# Altium PCB Copy of KNX_Relay_16CH_V1.2.PcbDoc (part 1 of 2)
Units mm, origin at the board's own origin, x right, y up, seen from the top; angles counter-clockwise.
Board outline 84.5 x 146.28 mm, 2 copper layers (F.Cu, B.Cu); 185 components, 162 nets, 571 pads, 629 vias.
Unrouted connection lines stored in the file: 248.
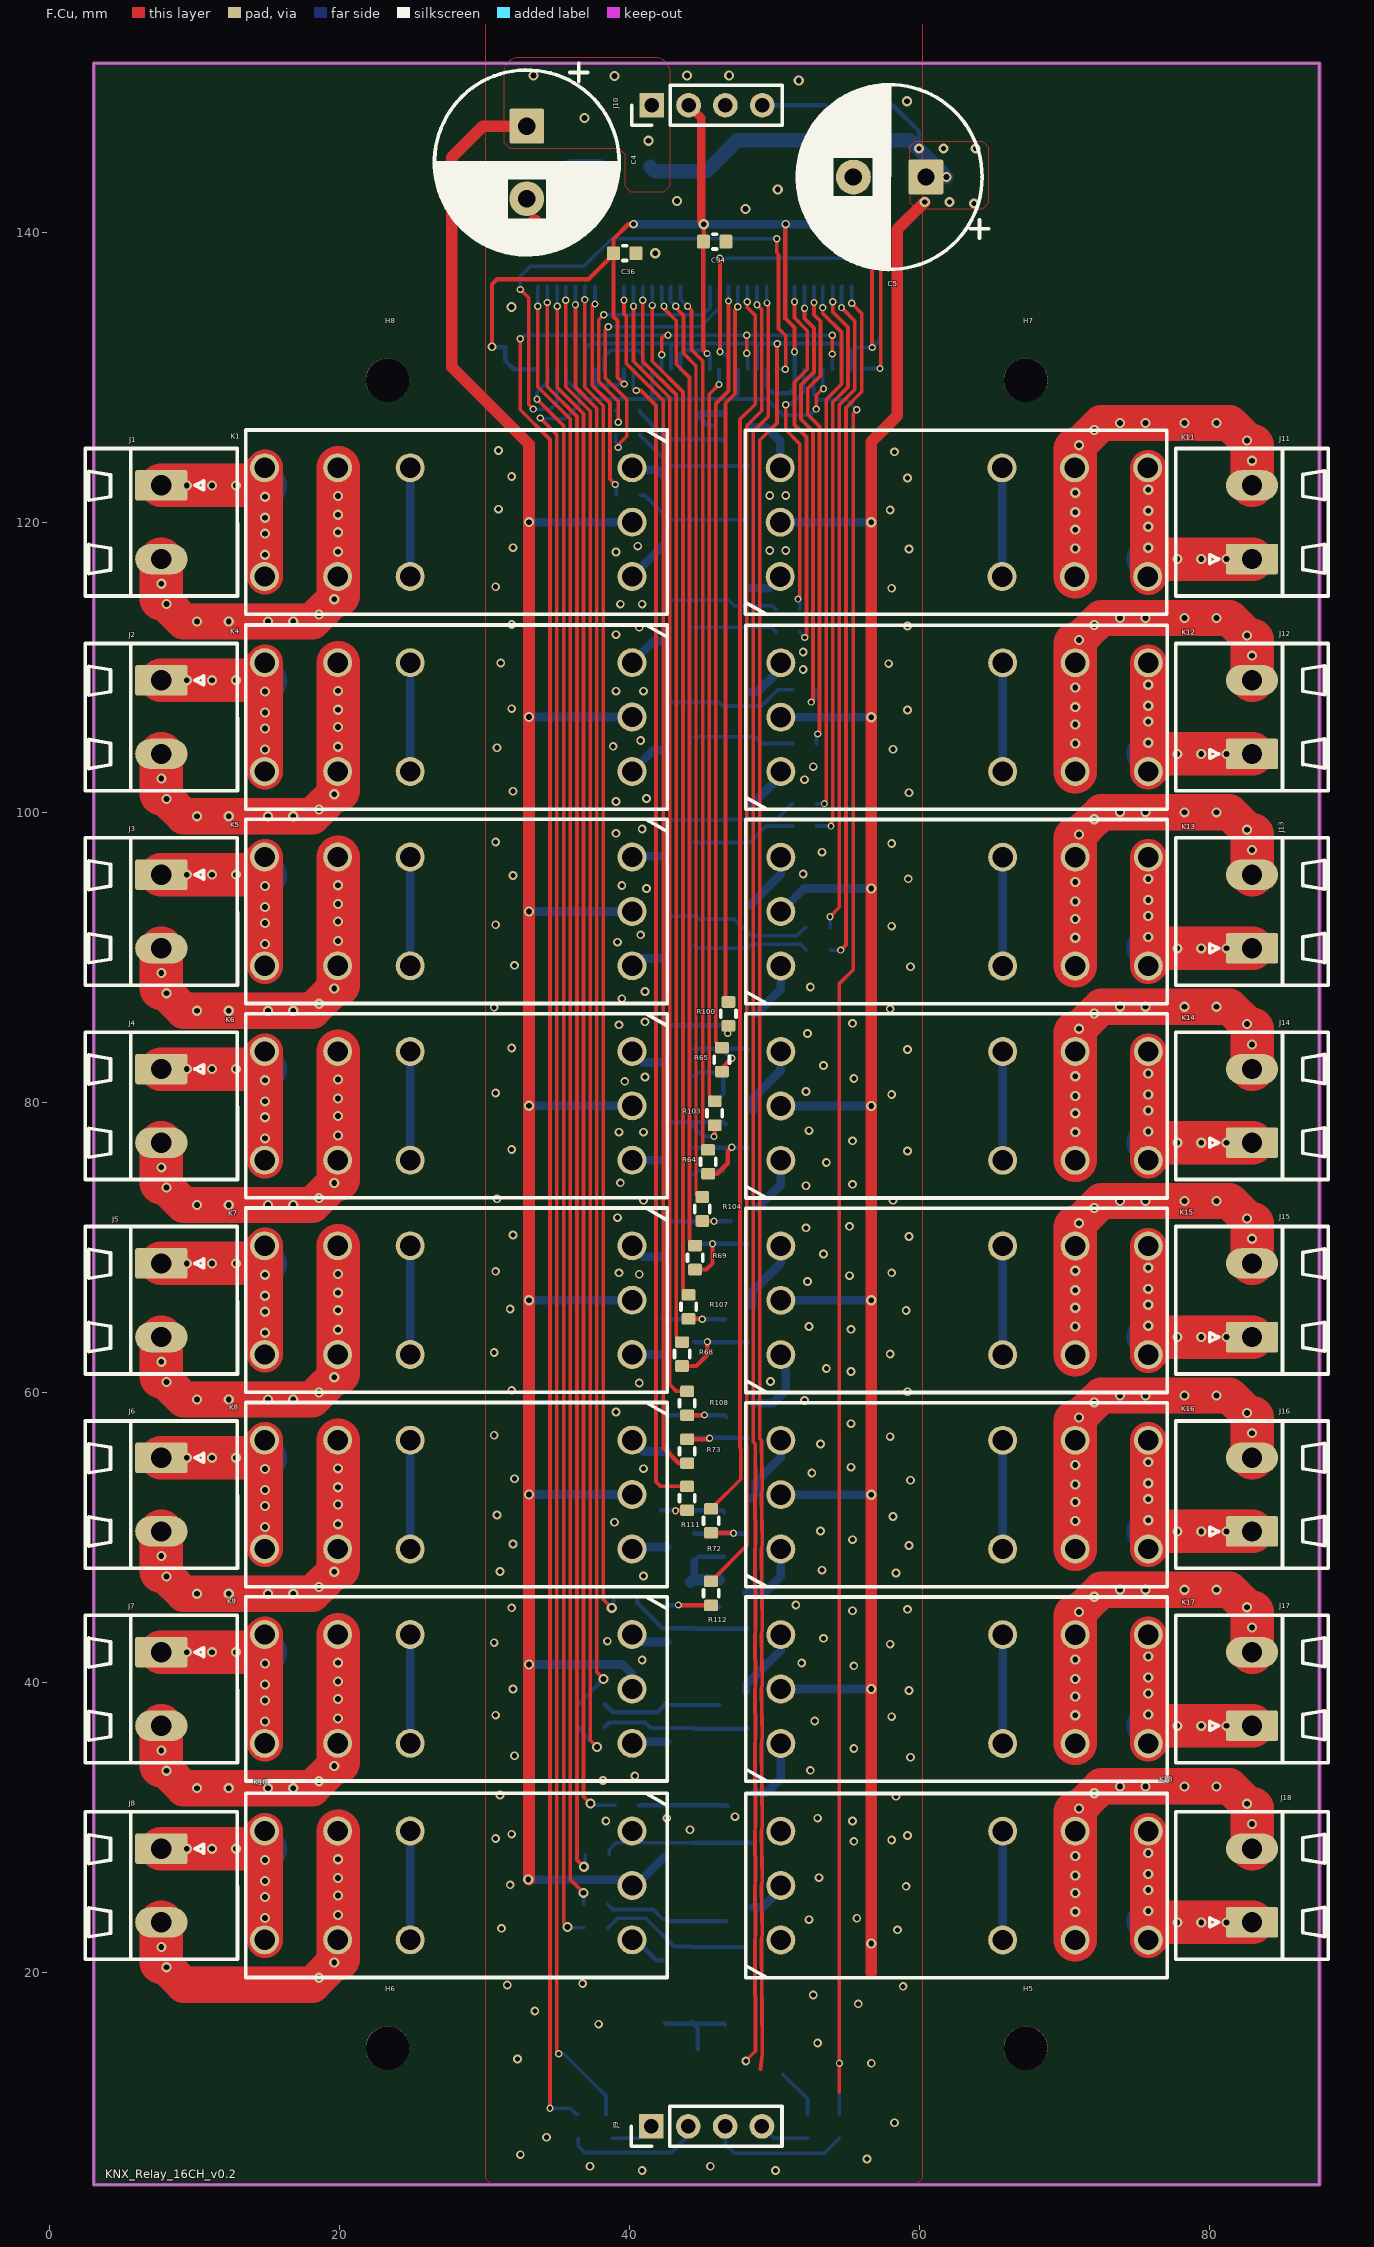
[diagram p0: F.Cu view]
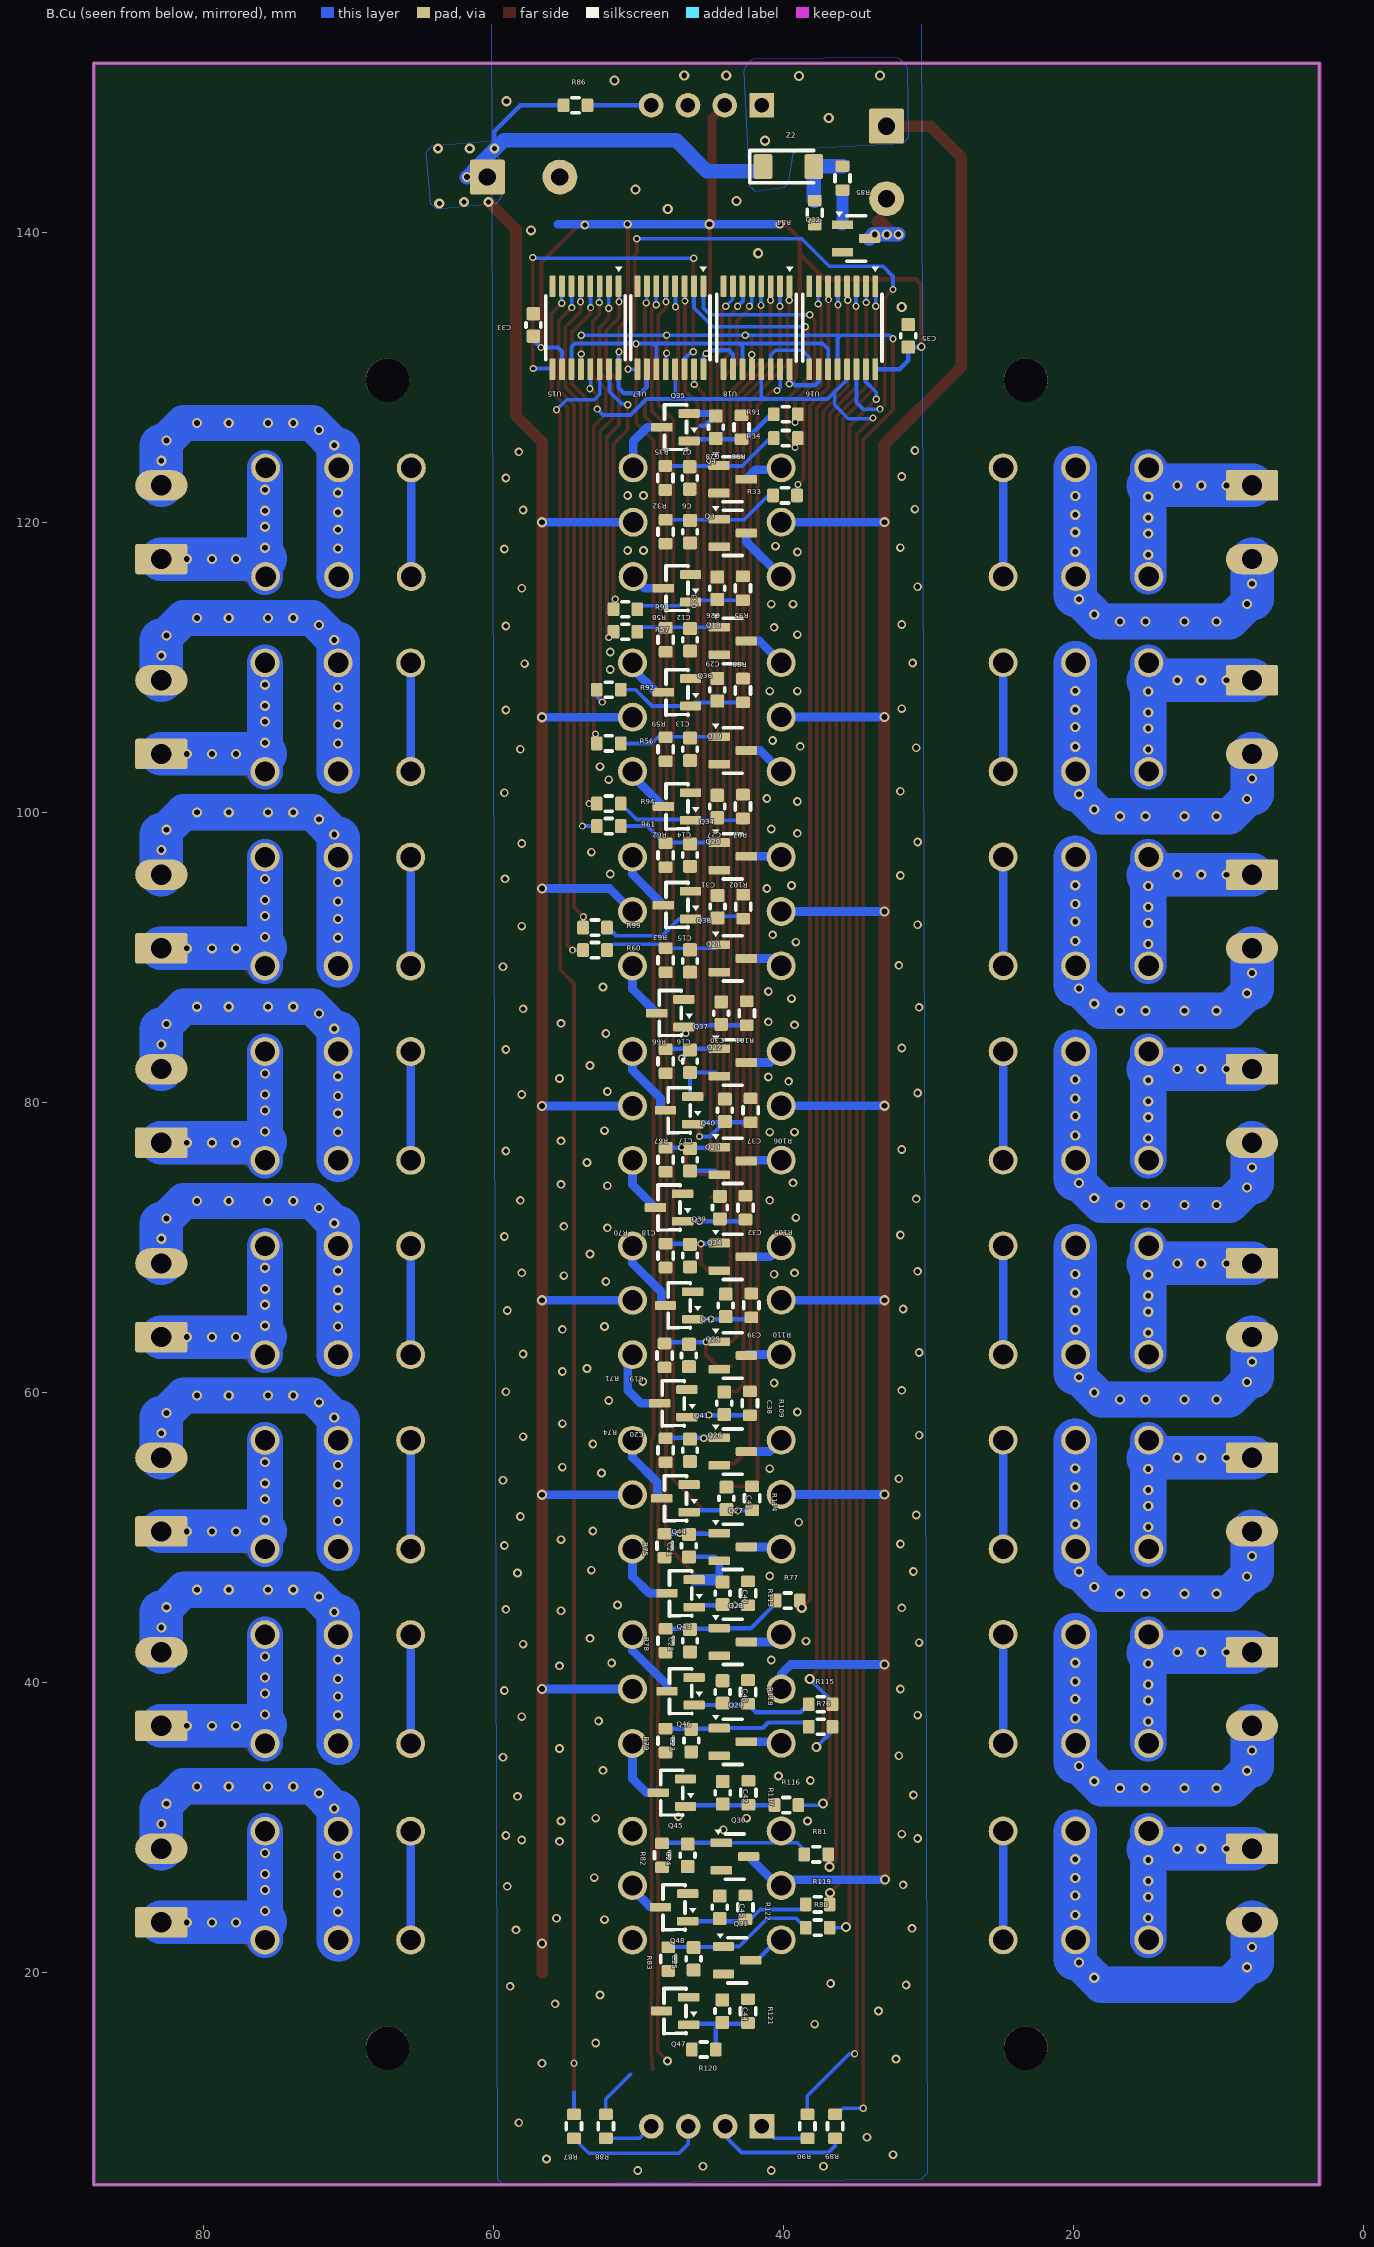
[diagram p1: B.Cu view, seen from below]

## Layer stack, top to bottom
F.Mask: solder mask 0.0102, Solder Resist, Dk 3.5
F.Cu: signal copper 0.0356
Dielectric 1: dielectric 0.32, FR-4, Dk 4.8
B.Cu: signal copper 0.0356
B.Mask: solder mask 0.0102, Solder Resist, Dk 3.5

## Board outline
3.05,5.36 3.05,151.64 87.55,151.64 87.55,5.36

## Design rules (kind name [scope] priority, off if disabled: settings)
Clearance [All] p1: gap=0.2 ignorepadtopadclearanceinfootprint=TRUE
Clearance "Clearence 0,5_Polygon" [InNamedPolygon('F.Cu-') OR InNamedPolygon('B.Cu-') OR InNamedPolygon('F.Cu--1') OR InNamedPolygon('B.Cu--1')] p2: gap=0.5 ignorepadtopadclearanceinfootprint=FALSE
Clearance "Clearence 0,35_Polygon" [InNamedPolygon('F.Cu--2') OR InNamedPolygon('B.Cu--2')] p3: gap=0.35 ignorepadtopadclearanceinfootprint=FALSE
Clearance "Clearence 0,2_NetClass" [InNetClass('Default')] p4: gap=0.2 ignorepadtopadclearanceinfootprint=FALSE
ComponentClearance [All] p1: gap=0 collisioncheckmode=3 verticalgap=0 showdistances=FALSE
MinimumSolderMaskSliver [All] p1: minsoldermaskwidth=0
PolygonConnect Polygon_B.Cu--2_ConnectDirect [IsNamedPolygon('B.Cu--2') vs IsVia] p1: connectstyle=Direct reliefconductorwidth=0.254 reliefentries=4 polygonreliefangle="90 Angle" airgapwidth=0.254
PolygonConnect Polygon_B.Cu--2_ConnectRelief45 [IsNamedPolygon('B.Cu--2') vs (IsThruPin or IsSMTPin) and (PadShape_AllLayers = 'Round')] p2: connectstyle=Relief reliefconductorwidth=0.35 reliefentries=4 polygonreliefangle="45 Angle" airgapwidth=0.35
PolygonConnect Polygon_B.Cu--2_ConnectRelief90 [IsNamedPolygon('B.Cu--2') vs (IsThruPin or IsSMTPin) and (PadShape_AllLayers <> 'Round')] p3: connectstyle=Relief reliefconductorwidth=0.35 reliefentries=4 polygonreliefangle="90 Angle" airgapwidth=0.35
PolygonConnect Polygon_F.Cu--2_ConnectDirect [IsNamedPolygon('F.Cu--2') vs IsVia] p4: connectstyle=Direct reliefconductorwidth=0.254 reliefentries=4 polygonreliefangle="90 Angle" airgapwidth=0.254
PolygonConnect Polygon_F.Cu--2_ConnectRelief45 [IsNamedPolygon('F.Cu--2') vs (IsThruPin or IsSMTPin) and (PadShape_AllLayers = 'Round')] p5: connectstyle=Relief reliefconductorwidth=0.35 reliefentries=4 polygonreliefangle="45 Angle" airgapwidth=0.35
PolygonConnect Polygon_F.Cu--2_ConnectRelief90 [IsNamedPolygon('F.Cu--2') vs (IsThruPin or IsSMTPin) and (PadShape_AllLayers <> 'Round')] p6: connectstyle=Relief reliefconductorwidth=0.35 reliefentries=4 polygonreliefangle="90 Angle" airgapwidth=0.35
PolygonConnect Polygon_B.Cu--1_ConnectDirect [IsNamedPolygon('B.Cu--1') vs IsVia] p7: connectstyle=Direct reliefconductorwidth=0.254 reliefentries=4 polygonreliefangle="90 Angle" airgapwidth=0.254
PolygonConnect Polygon_B.Cu--1_ConnectRelief45 [IsNamedPolygon('B.Cu--1') vs (IsThruPin or IsSMTPin) and (PadShape_AllLayers = 'Round')] p8: connectstyle=Relief reliefconductorwidth=0.5 reliefentries=4 polygonreliefangle="45 Angle" airgapwidth=0.5
PolygonConnect Polygon_B.Cu--1_ConnectRelief90 [IsNamedPolygon('B.Cu--1') vs (IsThruPin or IsSMTPin) and (PadShape_AllLayers <> 'Round')] p9: connectstyle=Relief reliefconductorwidth=0.5 reliefentries=4 polygonreliefangle="90 Angle" airgapwidth=0.5
PolygonConnect Polygon_F.Cu--1_ConnectDirect [IsNamedPolygon('F.Cu--1') vs IsVia] p10: connectstyle=Direct reliefconductorwidth=0.254 reliefentries=4 polygonreliefangle="90 Angle" airgapwidth=0.254
PolygonConnect Polygon_F.Cu--1_ConnectRelief45 [IsNamedPolygon('F.Cu--1') vs (IsThruPin or IsSMTPin) and (PadShape_AllLayers = 'Round')] p11: connectstyle=Relief reliefconductorwidth=0.5 reliefentries=4 polygonreliefangle="45 Angle" airgapwidth=0.5
PolygonConnect Polygon_F.Cu--1_ConnectRelief90 [IsNamedPolygon('F.Cu--1') vs (IsThruPin or IsSMTPin) and (PadShape_AllLayers <> 'Round')] p12: connectstyle=Relief reliefconductorwidth=0.5 reliefentries=4 polygonreliefangle="90 Angle" airgapwidth=0.5
PolygonConnect Polygon_B.Cu-_ConnectDirect [IsNamedPolygon('B.Cu-') vs IsVia] p13: connectstyle=Direct reliefconductorwidth=0.254 reliefentries=4 polygonreliefangle="90 Angle" airgapwidth=0.254
PolygonConnect Polygon_B.Cu-_ConnectRelief45 [IsNamedPolygon('B.Cu-') vs (IsThruPin or IsSMTPin) and (PadShape_AllLayers = 'Round')] p14: connectstyle=Relief reliefconductorwidth=0.5 reliefentries=4 polygonreliefangle="45 Angle" airgapwidth=0.5
PolygonConnect Polygon_B.Cu-_ConnectRelief90 [IsNamedPolygon('B.Cu-') vs (IsThruPin or IsSMTPin) and (PadShape_AllLayers <> 'Round')] p15: connectstyle=Relief reliefconductorwidth=0.5 reliefentries=4 polygonreliefangle="90 Angle" airgapwidth=0.5
PolygonConnect Polygon_F.Cu-_ConnectDirect [IsNamedPolygon('F.Cu-') vs IsVia] p16: connectstyle=Direct reliefconductorwidth=0.254 reliefentries=4 polygonreliefangle="90 Angle" airgapwidth=0.254
PolygonConnect Polygon_F.Cu-_ConnectRelief45 [IsNamedPolygon('F.Cu-') vs (IsThruPin or IsSMTPin) and (PadShape_AllLayers = 'Round')] p17: connectstyle=Relief reliefconductorwidth=0.5 reliefentries=4 polygonreliefangle="45 Angle" airgapwidth=0.5
PolygonConnect Polygon_F.Cu-_ConnectRelief90 [IsNamedPolygon('F.Cu-') vs (IsThruPin or IsSMTPin) and (PadShape_AllLayers <> 'Round')] p18: connectstyle=Relief reliefconductorwidth=0.5 reliefentries=4 polygonreliefangle="90 Angle" airgapwidth=0.5
RoutingVias [All] p1: holewidth=0.711 width=1.27 viastyle="Through Hole" minholewidth=0.711 minwidth=1.27 maxholewidth=0.711 maxwidth=1.27
SilkToSilkClearance [All] p1: silktosilkclearance=0
SilkToSolderMaskClearance [IsPad] p1: minsilkscreentomaskgap=0 clearancetoexposedcopper=TRUE
SolderMaskExpansion [All] p1: expansion=0 istentingtop=FALSE
SupplyNets "Schematic Supply Nets_3" [InNet('GND')] p1: voltage=0.000
SupplyNets "Schematic Supply Nets_1" [InNet('+12V')] p2: voltage=0.000
SupplyNets "Schematic Supply Nets" [InNet('+3V3')] p3: voltage=0.000
Width [All] p1: maxlimit=10 minlimit=0.2 preferedwidth=0.2 minimp=50.000000 maximp=50.000000 favimp=50.000000
26 further rules are at their usual default settings.

## Classes and differential pairs
component class "Shift register": C33 C34 C35 C36 U15 U16 U17 U18
component class RELAYS: C6 C7 C12 C13 C14 C15 C16 C17 C18 C19 C20 C21 C22 C23 C24 C25 C26 C27 C28 C29 C30 C31 C32 C37 C38 C39 C40 C41 C42 C43 C44 C45 K1 K4 K5 K6 K7 K8 K9 K10 K11 K12 K13 K14 K15 K16 K17 K18 Q3 Q4 Q18 Q19 Q20 Q21 Q22 Q23 Q24 Q25 Q26 Q27 Q28 Q29 Q30 Q31 Q33 Q34 Q35 Q36 Q37 Q38 Q39 Q40 Q41 Q42 Q43 Q44 Q45 Q46 Q47 Q48 R32 R33 R34 R35 R56 R57 R58 R59 R60 R61 R62 R63 R64 R65 R66 R67 R68 R69 R70 R71 R72 R73 R74 R75 R76 R77 R78 R79 R80 R81 R82 R83 R91 R92 R93 R94 R95 R96 R97 R98 R99 R100 R101 R102 R103 R104 R105 R106 R107 R108 R109 R110 R111 R112 R113 R114 R115 R116 R117 R118 R119 R120 R121 R122
component class KNX_Relay_16CH_V0.2: C4 C5 H5 H6 H7 H8 J1 J2 J3 J4 J5 J6 J7 J8 J9 J10 J11 J12 J13 J14 J15 J16 J17 J18 Q32 R84 R85 R86 R87 R88 R89 R90 Z2

## Components (designator, comment, footprint, x,y, rotation, side; value= is the part's Value field where it differs from the comment)
C4 "1500uf/35V" CP_Radial_D12.5mm_P5.00mm 32.9,147.3 r270 top
C5 "1500uf/35V" CP_Radial_D12.5mm_P5.00mm 60.419,143.79 r180 top
C6 "100nF" C_0603_1608Metric#1 46.45,119.34 r270 bottom
C7 "100nF" C_0603_1608Metric#1 46.47,123.04 r270 bottom
C12 "100nF" C_0603_1608Metric#1 46.45,111.89 r270 bottom
C13 "100nF" C_0603_1608Metric#1 46.45,104.34 r270 bottom
C14 "100nF" C_0603_1608Metric#1 46.45,97.04 r270 bottom
C15 "100nF" C_0603_1608Metric#1 46.45,89.74 r270 bottom
C16 "100nF" C_0603_1608Metric#1 46.45,82.828 r270 bottom
C17 "100nF" C_0603_1608Metric#1 46.45,76.04 r270 bottom
C18 "100nF" C_0603_1608Metric#1 46.45,69.427 r270 bottom
C19 "100nF" C_0603_1608Metric#1 46.52,62.54 r270 bottom
C20 "100nF" C_0603_1608Metric#1 46.45,56.002 r270 bottom
C21 "100nF" C_0603_1608Metric#1 46.52,49.427 r270 bottom
C22 "100nF" C_0603_1608Metric#1 46.45,42.877 r270 bottom
C23 "100nF" C_0603_1608Metric#1 46.36,35.99 r270 bottom
C24 "100nF" C_0603_1608Metric#1 46.61,28.078 r270 bottom
C25 "100nF" C_0603_1608Metric#1 46.2,20.94 r270 bottom
C26 "100nF" C_0603_1608Metric#1 44.57,115.44 r90 bottom
C27 "100nF" C_0603_1608Metric#1 44.57,100.39 r90 bottom
C28 "100nF" C_0603_1608Metric#1 44.67,126.54 r90 bottom
C29 "100nF" C_0603_1608Metric#1 44.57,108.44 r90 bottom
C30 "100nF" C_0603_1608Metric#1 44.3,86.14 r90 bottom
C31 "100nF" C_0603_1608Metric#1 44.55,93.49 r90 bottom
C32 "100nF" C_0603_1608Metric#1 44.39,72.74 r90 bottom
C33 "100nF" C_0603_1608Metric#1 57.25,133.59 r90 bottom
C34 "100nF" C_0603_1608Metric#2 45.85,139.34 r180 top
C35 "100nF" C_0603_1608Metric#1 31.4,132.84 r90 bottom
C36 "100nF" C_0603_1608Metric#2 39.65,138.54 r180 top
C37 "100nF" C_0603_1608Metric#1 44.04,79.44 r90 bottom
C38 "100nF" C_0603_1608Metric#1 44.09,59.24 r90 bottom
C39 "100nF" C_0603_1608Metric#1 43.99,65.99 r90 bottom
C40 "100nF" C_0603_1608Metric#1 44.2,46.14 r90 bottom
C41 "100nF" C_0603_1608Metric#1 43.94,52.69 r90 bottom
C42 "100nF" C_0603_1608Metric#1 44.19,32.39 r90 bottom
C43 "100nF" C_0603_1608Metric#1 44.2,39.34 r90 bottom
C44 "100nF" C_0603_1608Metric#1 44.22,17.34 r90 bottom
C45 "100nF" C_0603_1608Metric#1 44.403,24.49 r90 bottom
H5 "MountingHole" MountingHole_3mm 67.3,14.79 r0 top
H6 "MountingHole" MountingHole_3mm 23.3,14.79 r0 top
H7 "MountingHole" MountingHole_3mm 67.3,129.79 r0 top
H8 "MountingHole" MountingHole_3mm 23.3,129.79 r0 top
J1 "DG129-5.08-02P-14-00AH" DG129-5.08-02P 7.7,122.53 r270 top
J2 "DG129-5.08-02P-14-00AH" DG129-5.08-02P 7.7,109.092 r270 top
J3 "DG129-5.08-02P-14-00AH" DG129-5.08-02P 7.7,95.691 r270 top
J4 "DG129-5.08-02P-14-00AH" DG129-5.08-02P 7.7,82.289 r270 top
J5 "DG129-5.08-02P-14-00AH" DG129-5.08-02P 7.7,68.888 r270 top
J6 "DG129-5.08-02P-14-00AH" DG129-5.08-02P 7.7,55.486 r270 top
J7 "DG129-5.08-02P-14-00AH" DG129-5.08-02P 7.7,42.085 r270 top
J8 "DG129-5.08-02P-14-00AH" DG129-5.08-02P 7.7,28.535 r270 top
J9 "Conn_01x04" PinHeader_1x04_P2.54mm_Vertical 41.49,9.39 r90 top
J10 "Conn_01x04" PinHeader_1x04_P2.54mm_Vertical 41.51,148.74 r90 top
J11 "DG129-5.08-02P-14-00AH" DG129-5.08-02P 82.9,117.45 r90 top
J12 "DG129-5.08-02P-14-00AH" DG129-5.08-02P 82.9,104.012 r90 top
J13 "DG129-5.08-02P-14-00AH" DG129-5.08-02P 82.9,90.611 r90 top
J14 "DG129-5.08-02P-14-00AH" DG129-5.08-02P 82.9,77.209 r90 top
J15 "DG129-5.08-02P-14-00AH" DG129-5.08-02P 82.9,63.808 r90 top
J16 "DG129-5.08-02P-14-00AH" DG129-5.08-02P 82.9,50.406 r90 top
J17 "DG129-5.08-02P-14-00AH" DG129-5.08-02P 82.9,37.005 r90 top
J18 "DG129-5.08-02P-14-00AH" DG129-5.08-02P 82.9,23.455 r90 top
K1 "RT314F12" RELAY9-500X1142_618 40.16,119.995 r180 top
K4 "RT314F12" RELAY9-500X1142_618 40.16,106.557 r180 top
K5 "RT314F12" RELAY9-500X1142_618 40.16,93.156 r180 top
K6 "RT314F12" RELAY9-500X1142_618 40.16,79.754 r180 top
K7 "RT314F12" RELAY9-500X1142_618 40.16,66.353 r180 top
K8 "RT314F12" RELAY9-500X1142_618 40.16,52.951 r180 top
K9 "RT314F12" RELAY9-500X1142_618 40.16,39.55 r180 top
K10 "RT314F12" RELAY9-500X1142_618 40.16,26 r180 top
K11 "RT314F12" RELAY9-500X1142_618 50.369,119.99 r0 top
K12 "RT314F12" RELAY9-500X1142_618 50.41,106.547 r0 top
K13 "RT314F12" RELAY9-500X1142_618 50.41,93.146 r0 top
K14 "RT314F12" RELAY9-500X1142_618 50.41,79.744 r0 top
K15 "RT314F12" RELAY9-500X1142_618 50.41,66.343 r0 top
K16 "RT314F12" RELAY9-500X1142_618 50.41,52.941 r0 top
K17 "RT314F12" RELAY9-500X1142_618 50.41,39.54 r0 top
K18 "RT314F12" RELAY9-500X1142_618 50.41,25.99 r0 top
Q3 "2N7002ET1G" SOT-23 43.5,119.252 r0 bottom
Q4 "2N7002ET1G" SOT-23 43.52,122.952 r0 bottom
Q18 "2N7002ET1G" SOT-23 43.5,111.802 r0 bottom
Q19 "2N7002ET1G" SOT-23 43.5,104.252 r0 bottom
Q20 "2N7002ET1G" SOT-23 43.5,96.952 r0 bottom
Q21 "2N7002ET1G" SOT-23 43.5,89.915 r0 bottom
Q22 "2N7002ET1G" SOT-23 43.5,82.74 r0 bottom
Q23 "2N7002ET1G" SOT-23 43.5,75.952 r0 bottom
Q24 "2N7002ET1G" SOT-23 43.5,69.34 r0 bottom
Q25 "2N7002ET1G" SOT-23 43.5,62.54 r0 bottom
Q26 "2N7002ET1G" SOT-23 43.5,55.915 r0 bottom
Q27 "2N7002ET1G" SOT-23 43.5,49.34 r0 bottom
Q28 "2N7002ET1G" SOT-23 43.5,42.79 r0 bottom
Q29 "2N7002ET1G" SOT-23 43.5,35.902 r0 bottom
Q30 "2N7002ET1G" SOT-23 43.35,27.99 r0 bottom
Q31 "2N7002ET1G" SOT-23 43.2,20.84 r0 bottom
Q32 "2N7002ET1G" SOT-23 35,139.552 r0 bottom
Q33 "2N7002ET1G" SOT-23 47.35,115.44 r180 bottom
Q34 "2N7002ET1G" SOT-23 47.35,100.39 r180 bottom
Q35 "2N7002ET1G" SOT-23 47.45,126.54 r180 bottom
Q36 "2N7002ET1G" SOT-23 47.35,108.265 r180 bottom
Q37 "2N7002ET1G" SOT-23 47.81,86.14 r180 bottom
Q38 "2N7002ET1G" SOT-23 47.35,93.59 r180 bottom
Q39 "2N7002ET1G" SOT-23 47.9,72.74 r180 bottom
Q40 "2N7002ET1G" SOT-23 47.2,79.44 r180 bottom
Q41 "2N7002ET1G" SOT-23 47.6,59.24 r180 bottom
Q42 "2N7002ET1G" SOT-23 47.2,65.99 r180 bottom
Q43 "2N7002ET1G" SOT-23 47.1,46.14 r180 bottom
Q44 "2N7002ET1G" SOT-23 47.45,52.69 r180 bottom
Q45 "2N7002ET1G" SOT-23 47.7,32.39 r180 bottom
Q46 "2N7002ET1G" SOT-23 47.1,39.39 r180 bottom
Q47 "2N7002ET1G" SOT-23 47.48,17.34 r180 bottom
Q48 "2N7002ET1G" SOT-23 47.55,24.49 r180 bottom
R32 "10K" R_0603_1608Metric#1 48.13,119.34 r270 bottom
R33 "1K" R_0603_1608Metric#1 39.9,121.84 r0 bottom
R34 "1K" R_0603_1608Metric#1 39.85,125.79 r0 bottom
R35 "10K" R_0603_1608Metric#1 48.15,123.04 r270 bottom
R56 "1K" R_0603_1608Metric#1 52.05,104.74 r180 bottom
R57 "1K" R_0603_1608Metric#1 50.9,112.44 r180 bottom
R58 "10K" R_0603_1608Metric#1 48.13,111.89 r270 bottom
R59 "10K" R_0603_1608Metric#1 48.13,104.34 r270 bottom
R60 "1K" R_0603_1608Metric#1 53,90.49 r180 bottom
R61 "1K" R_0603_1608Metric#1 52.05,99.04 r180 bottom
R62 "10K" R_0603_1608Metric#1 48.13,97.04 r270 bottom
R63 "10K" R_0603_1608Metric#1 48.13,89.79 r270 bottom
R64 "1K" R_0603_1608Metric#2 45.4,75.89 r90 top
R65 "1K" R_0603_1608Metric#2 46.35,82.94 r90 top
R66 "10K" R_0603_1608Metric#1 48.13,82.828 r270 bottom
R67 "10K" R_0603_1608Metric#1 48.13,76.04 r270 bottom
R68 "1K" R_0603_1608Metric#2 43.6,62.64 r90 top
R69 "1K" R_0603_1608Metric#2 44.5,69.29 r90 top
R70 "10K" R_0603_1608Metric#1 48.13,69.427 r270 bottom
R71 "10K" R_0603_1608Metric#1 48.2,62.54 r270 bottom
R72 "1K" R_0603_1608Metric#2 45.6,51.14 r90 top
R73 "1K" R_0603_1608Metric#2 43.95,55.94 r270 top
R74 "10K" R_0603_1608Metric#1 48.13,56.002 r270 bottom
R75 "10K" R_0603_1608Metric#1 48.2,49.427 r270 bottom
R76 "1K" R_0603_1608Metric#1 37.45,36.94 r0 bottom
R77 "1K" R_0603_1608Metric#1 39.7,45.64 r0 bottom
R78 "10K" R_0603_1608Metric#1 48.13,42.877 r270 bottom
R79 "10K" R_0603_1608Metric#1 48.13,35.99 r270 bottom
R80 "1K" R_0603_1608Metric#1 37.65,23.09 r0 bottom
R81 "1K" R_0603_1608Metric#1 37.75,28.14 r0 bottom
R82 "10K" R_0603_1608Metric#1 48.38,28.078 r270 bottom
R83 "10K" R_0603_1608Metric#1 47.95,20.927 r270 bottom
R84 "10K" R_0603_1608Metric#1 37.845,141.34 r270 bottom
R85 "10K" R_0603_1608Metric#1 35.935,143.715 r270 bottom
R86 "0R" R_0603_1608Metric#1 54.345,148.74 r0 bottom
R87 "33R" R_0603_1608Metric#1 54.45,9.39 r270 bottom
R88 "33R" R_0603_1608Metric#1 52.25,9.39 r270 bottom
R89 "33R" R_0603_1608Metric#1 36.45,9.39 r270 bottom
R90 "33R" R_0603_1608Metric#1 38.35,9.39 r270 bottom
R91 "1K" R_0603_1608Metric#1 39.85,127.44 r0 bottom
R92 "1K" R_0603_1608Metric#1 52.05,108.44 r180 bottom
R93 "1K" R_0603_1608Metric#1 50.9,113.99 r180 bottom
R94 "1K" R_0603_1608Metric#1 52.05,100.59 r180 bottom
R95 "10K" R_0603_1608Metric#1 42.8,115.44 r90 bottom
R96 "10K" R_0603_1608Metric#1 42.9,126.54 r90 bottom
R97 "10K" R_0603_1608Metric#1 42.8,100.39 r90 bottom
R98 "10K" R_0603_1608Metric#1 42.8,108.39 r90 bottom
R99 "1K" R_0603_1608Metric#1 53,92.04 r180 bottom
R100 "1K" R_0603_1608Metric#2 46.8,86.09 r90 top
R101 "10K" R_0603_1608Metric#1 42.53,86.14 r90 bottom
R102 "10K" R_0603_1608Metric#1 42.78,93.49 r90 bottom
R103 "1K" R_0603_1608Metric#2 45.85,79.24 r90 top
R104 "1K" R_0603_1608Metric#2 45,72.64 r90 top
R105 "10K" R_0603_1608Metric#1 42.62,72.74 r90 bottom
R106 "10K" R_0603_1608Metric#1 42.27,79.44 r90 bottom
R107 "1K" R_0603_1608Metric#2 44.05,65.89 r90 top
R108 "1K" R_0603_1608Metric#2 43.95,59.24 r90 top
R109 "10K" R_0603_1608Metric#1 42.32,59.24 r90 bottom
R110 "10K" R_0603_1608Metric#1 42.22,65.99 r90 bottom
R111 "1K" R_0603_1608Metric#2 43.95,52.69 r90 top
R112 "1K" R_0603_1608Metric#2 45.6,46.14 r90 top
R113 "10K" R_0603_1608Metric#1 42.45,46.14 r90 bottom
R114 "10K" R_0603_1608Metric#1 42.17,52.69 r90 bottom
R115 "1K" R_0603_1608Metric#1 37.45,38.49 r0 bottom
R116 "1K" R_0603_1608Metric#1 39.8,31.54 r0 bottom
R117 "10K" R_0603_1608Metric#1 42.42,32.39 r90 bottom
R118 "10K" R_0603_1608Metric#1 42.45,39.34 r90 bottom
R119 "1K" R_0603_1608Metric#1 37.65,24.69 r0 bottom
R120 "1K" R_0603_1608Metric#1 45.5,14.69 r180 bottom
R121 "10K" R_0603_1608Metric#1 42.45,17.34 r90 bottom
R122 "10K" R_0603_1608Metric#1 42.633,24.49 r90 bottom
U15 "74HC595PW,118" TSSOP-16_4.4x5mm_P0.65mm 53.65,133.402 r90 bottom
U16 "74HC595PW,118" TSSOP-16_4.4x5mm_P0.65mm 35.95,133.402 r90 bottom
U17 "74HC595PW,118" TSSOP-16_4.4x5mm_P0.65mm 47.8,133.402 r90 bottom
U18 "74HC595PW,118" TSSOP-16_4.4x5mm_P0.65mm 41.86,133.402 r90 bottom
Z2 "6.8V" D_MiniMELF 39.67,144.515 r0 bottom

## Footprints (in the part's own frame and the unit in brackets; to place one, negate y for a bottom-side part, rotate by r counter-clockwise, add the part's x,y. Pads: shape width x height; smd on the part's side, far side on the other; paste and mask are expansions set on the pad)
C_0603_1608Metric#1 [mm]
  rrect25% 0.9x0.95 smd mask+0: 1(0.775,0) 2(-0.775,0)
  silkscreen extent -0.14,-0.51 0.14,0.51
C_0603_1608Metric#2 [mm]
  rrect25% 0.9x0.95 smd mask+0: 1(-0.775,0) 2(0.775,0)
  silkscreen extent -0.14,-0.51 0.14,0.51
CP_Radial_D12.5mm_P5.00mm [mm]
  rrect10% 2.4x2.4 hole 1.2 mask+0: 1(0,0)
  round 2.4 hole 1.2 mask+0: 2(5,0)
  silkscreen extent -4.32,-6.37 8.87,6.37
D_MiniMELF [mm]
  rrect19% 1.3x1.7 smd mask+0: 1(1.75,0) 2(-1.75,0)
  silkscreen extent -1.75,-1.11 2.66,1.11
DG129-5.08-02P [mm]
  rrect12% 2.1x3.6 hole 1.4 mask+0: 1(0,0)
  rrect100% 2.1x3.6 hole 1.4 mask+0: 2(5.08,0)
  silkscreen extent -2.54,-5.25 7.62,5.25
MountingHole_3mm [mm]
  round 3 hole 3 mask+0: Un1(0,0)
PinHeader_1x04_P2.54mm_Vertical [mm]
  rect 1.7x1.7 hole 1 mask+0: 1(0,0)
  round 1.7 hole 1 mask+0: 2(0,-2.54) 3(0,-5.08) 4(0,-7.62)
  silkscreen extent -1.38,-9 1.38,1.38
R_0603_1608Metric#1 [mm]
  rrect25% 0.8x0.95 smd mask+0: 1(0.825,0) 2(-0.825,0)
  silkscreen extent -0.24,-0.52 0.24,0.52
R_0603_1608Metric#2 [mm]
  rrect25% 0.8x0.95 smd mask+0: 1(-0.825,0) 2(0.825,0)
  silkscreen extent -0.24,-0.52 0.24,0.52
RELAY9-500X1142_618 [mm]
  round 2 hole 1.4 mask+0: 11(20.3,-3.75) 11(20.3,3.75) 12(15.3,-3.75) 12(15.3,3.75) 14(25.34,-3.75) 14(25.34,3.75) A1(0,-3.75) A2(0,3.75) A3(0,0)
  silkscreen extent -2.42,-6.35 26.65,6.35
SOT-23 [mm]
  rrect25% 1.475x0.6 smd mask+0: 1(0.937,-0.95) 2(0.937,0.95) 3(-0.937,0)
  silkscreen extent -0.65,-1.84 1.4,1.56
TSSOP-16_4.4x5mm_P0.65mm [mm]
  rrect25% 1.475x0.4 smd mask+0: 1(2.863,-2.275) 2(2.863,-1.625) 3(2.863,-0.975) 4(2.863,-0.325) 5(2.863,0.325) 6(2.863,0.975) 7(2.863,1.625) 8(2.863,2.275) 9(-2.863,2.275) 10(-2.863,1.625) 11(-2.863,0.975) 12(-2.863,0.325) 13(-2.863,-0.325) 14(-2.863,-0.975) 15(-2.863,-1.625) 16(-2.863,-2.275)
  silkscreen extent -2.2,-2.74 4.19,2.74

## Part data
C4 C5: library part C_US, Package="THT 12.5x20mm", MF=SAMWHA, MP=RP1C158M12020PL, OZD=RP1C158M12020PL
C6 C7 C12 C13 C14 C15 C16 C17 C18 C19 C20 C21 C22 C23 C24 C25 C26 C27 C28 C29 C30 C31 C32 C37 C38 C39 C40 C41 C42 C43 C44 C45: library part C_3, Package=C_0603, MF=YAGEO, MP=CC0603KRX7R9BB104
C33 C34 C35 C36: library part C, Package=C_0603, MF=YAGEO, MP=CC0603KRX7R9BB104
J1 J2 J3 J4 J5 J6 J7 J8 J11 J12 J13 J14 J15 J16 J17 J18: library part Screw_Terminal_01x02, Package="THT V/T  5.08mm", MF=DEGSON, MP=DG129-5.08-02P-14-00AH, OZD=DG129-5.08-02P-14-00AH
K1 K4 K5 K6 K7 K8 K9 K10 K11 K12 K13 K14 K15 K16 K17 K18: library part RT314A03, Package=DIP,29x12.7mm, MF="TE Connectivity", MP=RT314F12, OZD=RT314F12
Q3 Q4 Q18 Q19 Q20 Q21 Q22 Q23 Q24 Q25 Q26 Q27 Q28 Q29 Q30 Q31 Q32 Q33 Q34 Q35 Q36 Q37 Q38 Q39 Q40 Q41 Q42 Q43 Q44 Q45 Q46 Q47 Q48: library part Q_NMOS_Depletion_GSD, Package=SOT-23, MF=onsemi, MP=2N7002ET1G, OZD=2N7002ET1G
R32 R33 R34 R35 R56 R57 R58 R59 R60 R61 R62 R63 R64 R65 R66 R67 R68 R69 R70 R71 R72 R73 R74 R75 R76 R77 R78 R79 R80 R81 R82 R83 R84 R85 R86 R87 R88 R89 R90 R91 R92 R93 R94 R95 R96 R97 R98 R99 R100 R101 R102 R103 R104 R105 R106 R107 R108 R109 R110 R111 R112 R113 R114 R115 R116 R117 R118 R119 R120 R121 R122: library part R_US, Package=R_0603
  R32 R35 R58 R59 R62 R63 R66 R67 R70 R71 R74 R75 R78 R79 R82 R83 R84 R85 R95 R96 R97 R98 R101 R102 R105 R106 R109 R110 R113 R114 R117 R118 R121 R122: MF=FOJAN, MP=FRC0603J103TS
  R33 R34 R56 R57 R60 R61 R64 R65 R68 R69 R72 R73 R76 R77 R80 R81 R91 R92 R93 R94 R99 R100 R103 R104 R107 R108 R111 R112 R115 R116 R119 R120: MF=YAGEO, MP=RC0603JR-071KL, OZD=RC0603JR-071KL
  R87 R88 R89 R90: MF=YAGEO, MP=RC0603JR-0733RL, OZD=RC0603JR-0733RL
U15 U16 U17 U18: library part 74HC595, Package=TSSOP-16, MF=Nexperia, MP=74HC595PW,118, OZD=74HC595PW,118
Z2: library part D_Zener, Package=D_MiniMELF, MF=PANJIT, MP=ZMM55-C6V8_R1_10001, OZD=ZMM55-C6V8_R1_10001

## Via types
v1: diameter 0.7, hole 0.4, F.Cu to B.Cu, tented both sides, 342 vias
v2: diameter 0.6, hole 0.35, F.Cu to B.Cu, tented both sides, 198 vias
v3: diameter 0.5, hole 0.3, F.Cu to B.Cu, tented both sides, 83 vias
v4: diameter 0.7, hole 0.35, F.Cu to B.Cu, tented both sides, 6 vias

## Nets (pads, with @x,y where several pads share a name; then routed paths per layer and width w, separated by ;. In a path a pad name is that pad's centre, name@x,y a point inside that pad or via, vN(x,y) a via of type N, cw(c..) or ccw(c..) an arc to the next point about the centre after c; other vN are vias at no path point)
+3V3: C33.2 C34.2 C35.2 C36.2 J10.2 U15.10 U15.16 U16.10 U16.16 U17.10 U17.16 U18.10 U18.16 | length 101.3
  F.Cu w0.254: 45.1,131.856 v3(45.328,131.628)
  F.Cu w0.3: v2(30.5,132.09) 30.5,136.39 30.85,136.74 37.15,136.74 38.875,138.465 C36.2@38.875,138.54 ; v3(39.608,129.519) 39.15,129.977 39.15,133.89 38.875,134.165 C36.2@38.875,138.54 ; v2(40.25,140.54) 39.9,140.54 38.875,139.515 C36.2@38.875,138.54 ; v1(45.1,140.54) 45.1,139.365 C34.2@45.075,139.34 45.075,131.881 v3(45.328,131.628) ; v2(50.75,140.54) 50.727,140.517 50.727,134.038 51.35,133.415 v3(51.35,131.736) ; v2(53.7,140.49) 54.1,140.49 56.7,137.89 56.7,132.063 v3(56.723,132.04)
  F.Cu w0.6: J10.2@44.05,148.74 44.935,147.855 44.935,140.705 v1(45.1,140.54)
  B.Cu w0.254: v3(45.328,131.628) 45.525,131.431 U17.16@45.525,130.54
  B.Cu w0.3: v2(30.5,132.09) 30.525,132.065 C35.2@31.4,132.065 31.4,131.14 32,130.54 U16.16@33.675,130.54 ; U16.10@37.575,130.54 37.575,129.665 37.796,129.444 39.227,129.444 39.585,129.802 U18.16@39.585,130.54 39.585,129.542 v3(39.608,129.519) ; U18.10@43.485,130.54 43.485,131.575 43.746,131.836 45.12,131.836 v3(45.328,131.628) ; U17.10@49.425,130.54 49.425,129.315 49.85,128.89 51,128.89 51.375,129.265 U15.16@51.375,130.54 51.375,131.711 v3(51.35,131.736) ; U15.10@55.275,130.54 55.275,131.765 55.55,132.04 v3(56.723,132.04) 57.25,132.567 C33.2@57.25,132.815
  B.Cu w0.6: v2(40.25,140.54) v1(45.1,140.54) 55.55,140.54
+12V: C4.1 C5.1 J10.1 K1.A3 K4.A3 K5.A3 K6.A3 K7.A3 K8.A3 K9.A3 K10.A3 K11.A3 K12.A3 K13.A3 K14.A3 K15.A3 K16.A3 K17.A3 K18.A3 R86.1 Z2.1 | length 381.8
  F.Cu w0.8: C4.1@32.9,147.3 29.87,147.3 27.735,145.165 27.735,130.69 33.05,125.375 v1(33.05,119.995) v1(33.05,106.557) v1(33.05,93.156) v1(33.05,79.754) v1(33.05,66.353) v1(33.05,52.951) v1(33.05,41.24) v1@33.05,26.4 ; 56.65,19.99 v1(56.65,21.99) v1(56.65,39.54) v1(56.65,52.941) v1(56.65,66.343) v1(56.65,79.744) v1(56.65,94.74) v1(56.65,106.547) v1(56.65,119.99) 56.65,125.54 58.45,127.34 58.45,140.18 v4(60.335,142.065)
  B.Cu w0.3: R86.1@55.17,148.74 58.135,148.74 59.935,146.94 v4(59.935,145.765)
  B.Cu w0.6: v1(33,26.4) K10.A3@39.6,26.4 ; v1(33.05,41.24) 39.5,41.24 40.16,40.58 K9.A3@40.16,39.55 ; v1(33.05,52.951) K8.A3@40.16,52.951 ; v1(33.05,66.353) K7.A3@40.16,66.353 ; v1(33.05,79.754) K6.A3@40.16,79.754 ; v1(33.05,93.156) K5.A3@40.16,93.156 ; v1(33.05,106.557) K4.A3@40.16,106.557 ; v1(33.05,119.995) K1.A3@40.16,119.995 ; K11.A3@50.369,119.99 v1(56.65,119.99) ; K17.A3@50.41,39.54 v1(56.65,39.54) ; K16.A3@50.41,52.941 v1(56.65,52.941) ; K15.A3@50.41,66.343 v1(56.65,66.343) ; K14.A3@50.41,79.744 v1(56.65,79.744) ; K13.A3@50.41,93.146 52.004,94.74 v1(56.65,94.74) ; K12.A3@50.41,106.547 v1(56.65,106.547)
  B.Cu w1: Z2.1@41.42,144.515 41.745,144.19 45.285,144.19 47.41,146.315 59.303,146.315 61.123,144.494 v1(61.828,143.79)
GND: C5.2 C6.1 C7.1 C12.1 C13.1 C14.1 C15.1 C16.1 C17.1 C18.1 C19.1 C20.1 C21.1 C22.1 C23.1 C24.1 C25.1 C26.1 C27.1 C28.1 C29.1 C30.1 C31.1 C32.1 C33.1 C34.1 C35.1 C36.1 C37.1 C38.1 C39.1 C40.1 C41.1 C42.1 C43.1 C44.1 C45.1 J10.3 Q3.2 Q4.2 Q18.2 Q19.2 Q20.2 Q21.2 Q22.2 Q23.2 Q24.2 Q25.2 Q26.2 Q27.2 Q28.2 Q29.2 Q30.2 Q31.2 Q32.2 Q33.2 Q34.2 Q35.2 Q36.2 Q37.2 Q38.2 Q39.2 Q40.2 Q41.2 Q42.2 Q43.2 Q44.2 Q45.2 Q46.2 Q47.2 Q48.2 R32.1 R35.1 R58.1 R59.1 R62.1 R63.1 R66.1 R67.1 R70.1 R71.1 R74.1 R75.1 R78.1 R79.1 R82.1 R83.1 R84.1 R95.1 R96.1 R97.1 R98.1 R101.1 R102.1 R105.1 R106.1 R109.1 R110.1 R113.1 R114.1 R117.1 R118.1 R121.1 R122.1 U15.8 U16.8 U17.8 U18.8 | length 15
  B.Cu w0.3: Q27.2@44.438,48.39 44.7,48.652 C21.1@46.52,48.652 ; Q23.2@44.438,75.002 44.7,75.265 C17.1@46.45,75.265 ; Q22.2@44.438,81.79 44.7,82.052 C16.1@46.45,82.053 46.45,80.577 Q40.2@46.263,80.39 ; C28.1@44.67,127.315 44.725,127.315 45.4,126.64 45.7,126.64
  B.Cu w0.5: C40.1@44.2,46.915 44.438,47.152 Q27.2@44.438,48.39 ; C28.1@44.67,127.315 44.845,127.49 Q35.2@46.513,127.49
  B.Cu w0.8: C40.1@44.2,46.915 44.375,47.09 Q43.2@46.163,47.09
  other v1: 31.85,134.84 41.75,138.54 57.41,140.115 47.985,141.59 43.25,142.14 50.2,142.94 41.285,146.29 36.885,147.865 59.11,149.015 51.65,150.44 38.935,150.765 33.35,150.79 43.95,150.79 46.85,150.79
  other v2: 40.85,6.34 50.05,6.34 37.25,6.64 45.55,6.64 56.35,7.14 32.45,7.44 34.25,8.64 58.25,9.64 56.65,13.74 32.25,14.04 52.95,15.14 37.85,16.44 33.45,17.34 55.75,17.84 52.65,18.44 58.85,19.04 31.55,19.14 36.75,19.24 58.45,22.94 31.15,23.04 52.35,23.64 55.65,23.74 59.05,25.94 31.75,26.04 53.05,26.54 55.45,29.04 58.05,29.14 30.75,29.24 59.15,29.44 31.85,29.54 44.15,29.84 38.35,30.44 55.35,30.44 42.55,30.64 52.95,30.64 47.25,30.74 58.35,32.14 31.05,32.24 38.15,33.24 40.35,33.54 52.45,33.94 59.35,34.84 32.05,34.94 55.45,35.44 52.75,37.34 58.05,37.64 30.75,37.74 59.25,39.44 31.95,39.54 55.45,41.14 51.85,41.34 40.85,41.54 57.95,42.64 30.65,42.74 38.45,42.84 53.35,43.04 55.35,44.94 59.15,45.04 31.85,45.14 51.45,45.34 40.95,47.34 58.35,47.54 31.05,47.64 53.25,47.74 59.25,49.44 31.95,49.54 55.35,49.84 53.15,50.44 38.95,51.04 58.15,51.44 30.85,51.54 59.35,53.94 32.05,54.04 52.55,54.44 40.95,54.74 55.25,54.84 53.15,56.44 57.95,56.94 30.65,57.04 55.25,57.84 39.05,58.64 52.05,59.44 59.15,60.04 31.85,60.14 40.65,60.64 49.7,60.74 55.25,61.44 53.55,61.64 57.95,62.64 30.65,62.74 55.25,64.34 52.35,64.54 59.05,65.64 31.75,65.74 52.25,67.64 55.15,68.04 40.65,68.14 39.25,68.24 58.05,68.24 30.75,68.34 53.35,69.54 59.25,70.74 31.95,70.84 52.15,71.34 55.15,71.44 39.15,72.04 40.95,73.24 58.15,73.24 30.85,73.34 52.15,74.24 55.35,74.34 39.35,74.44 53.55,75.84 59.15,76.64 31.85,76.74 55.35,77.34 39.25,77.94 40.95,77.94 52.35,78.04 58.05,80.54 30.75,80.64 52.15,80.74 39.65,81.44 55.45,81.64 41.05,81.74 53.35,82.54 59.15,83.64 31.85,83.74 52.25,84.74 39.25,85.34 55.35,85.44 41.05,85.54 57.95,86.44 30.65,86.54 39.45,87.14 41.05,87.64 52.45,87.94 59.35,89.34 32.05,89.44 39.15,91.04 40.75,91.54 58.05,92.14 30.75,92.24 41.15,94.74 39.45,94.94 59.2,95.4 31.95,95.64 51.95,95.74 53.25,97.24 58.05,97.84 30.75,97.94 39.05,98.54 40.85,98.84 39.05,100.74 41.15,100.94 59.25,101.34 31.95,101.44 52.05,102.24 52.65,103.14 58.15,104.34 30.85,104.44 38.85,104.54 40.75,104.94 59.15,107.04 31.85,107.14 39.05,108.34 40.95,108.34 51.95,109.84 57.85,110.24 31.1,110.29 51.95,111.04 39.05,112.24 40.65,112.74 59.15,112.84 31.85,112.94 39.35,114.34 40.85,114.34 58.05,115.44 30.75,115.54 39.05,117.94 49.65,118.04 50.75,118.04 59.25,118.14 31.95,118.24 40.55,118.34 57.95,120.84 30.95,120.89 49.65,121.84 50.75,121.84 59.15,123.04 31.85,123.14 58.25,124.84 30.95,124.94
NetC4_2: C4.2 Q32.3 | length 3.9
  F.Cu w1: v1(32.085,139.84) 32.57,139.84 33.445,140.715
  B.Cu w1: v1(32.085,139.84) 32.094,139.831 v1(32.885,139.831) v1(33.71,139.831) 33.807,139.831 Q32.3@34.098,139.54
NetC6_2: C6.2 Q3.1 R32.2 R33.1 | length 8.1
  B.Cu w0.254: R33.1@40.725,121.84 41.05,121.84 42.725,120.165 R32.2@48.13,120.165
NetC7_2: C7.2 Q4.1 R34.1 R35.2 | length 8.4
  B.Cu w0.254: R34.1@40.675,126.04 42.85,123.865 R35.2@48.15,123.865
NetC12_2: C12.2 Q18.1 R57.1 R58.2 | length 5.8
  B.Cu w0.254: Q18.1@44.438,112.752 49.763,112.752 R57.1@50.075,112.44
NetC13_2: C13.2 Q19.1 R56.1 R59.2 | length 7
  B.Cu w0.254: Q19.1@44.438,105.202 48.638,105.202 49.1,104.74 R56.1@51.225,104.74
NetC14_2: C14.2 Q20.1 R61.1 R62.2 | length 7.3
  B.Cu w0.254: Q20.1@44.438,97.902 48.093,97.902 R62.2@48.13,97.865 48.225,97.865 49.4,99.04 R61.1@51.225,99.04
NetC15_2: C15.2 Q21.1 R60.1 R63.2 | length 8.1
  B.Cu w0.254: Q21.1@44.438,90.865 44.688,90.615 R63.2@48.13,90.615 48.405,90.89 51.775,90.89 R60.1@52.175,90.49
NetC16_2: C16.2 Q22.1 R65.1 R66.2 | length 5.7
  F.Cu w0.3: R65.1@46.35,82.115 46.35,82.365 v3(47.025,83.04)
  B.Cu w0.3: Q22.1@44.438,83.69 48.093,83.69 R66.2@48.13,83.652 ; C16.2@46.45,83.602 47.013,83.04 v3(47.025,83.04)
NetC17_2: C17.2 Q23.1 R64.1 R67.2 | length 6.6
  F.Cu w0.3: R64.1@45.4,75.065 46.025,75.065 46.75,75.79 46.75,76.615 v3(47.025,76.89)
  B.Cu w0.3: Q23.1@44.438,76.903 44.475,76.865 R67.2@48.13,76.865
NetC18_2: C18.2 Q24.1 R69.1 R70.2 | length 6.4
  F.Cu w0.3: R69.1@44.5,68.465 45.275,68.465 45.7,68.89 v3(45.7,70.24)
  B.Cu w0.3: Q24.1@44.438,70.29 44.475,70.252 R70.2@48.13,70.252
NetC19_2: C19.2 Q25.1 R68.1 R71.2 | length 6.7
  F.Cu w0.3: R68.1@43.6,61.815 44.575,61.815 45.35,62.59 v3(45.35,63.49)
  B.Cu w0.3: Q25.1@44.438,63.49 44.475,63.452 R71.2@48.13,63.452
NetC20_2: C20.2 Q26.1 R73.1 R74.2 | length 5.3
  F.Cu w0.3: R73.1@43.95,56.765 45.425,56.765 v3(45.5,56.84)
  B.Cu w0.3: Q26.1@44.438,56.865 48.093,56.865 R74.2@48.13,56.827
NetC21_2: C21.2 Q27.1 R72.1 R75.2 | length 6.3
  F.Cu w0.3: R72.1@45.6,50.315 47.125,50.315 v3(47.15,50.29)
  B.Cu w0.3: Q27.1@44.438,50.29 44.475,50.252 48.13,50.252 48.093,50.29 v3(47.15,50.29)
NetC22_2: C22.2 Q28.1 R77.1 R78.2 | length 8.5
  B.Cu w0.3: R77.1@40.525,45.64 40.525,45.465 42.25,43.74 Q28.1@44.438,43.74 44.475,43.702 R78.2@48.13,43.702
NetC23_2: C23.2 Q29.1 R76.1 R79.2 | length 10.2
  B.Cu w0.3: R76.1@38.275,36.94 38.575,37.24 41.05,37.24 41.438,36.852 Q29.1@44.438,36.852 44.475,36.815 R79.2@48.13,36.815
NetC24_2: C24.2 Q30.1 R81.1 R82.2
NetC25_2: C25.2 Q31.1 R80.1 R83.2 | length 10.6
  B.Cu w0.254: R80.1@38.475,23.09 38.5,23.09 39.15,23.74 41.1,23.74 43.05,21.79 Q31.1@44.138,21.79
  B.Cu w0.3: Q31.1@44.138,21.79 44.175,21.752 R83.2@47.95,21.752
NetC26_2: C26.2 Q33.1 R93.1 R95.2 | length 7.5
  B.Cu w0.254: R95.2@42.8,114.615 46.825,114.615 47.2,114.24 49.825,114.24 R93.1@50.075,113.99
NetC27_2: C27.2 Q34.1 R94.1 R97.2 | length 9
  B.Cu w0.254: R97.2@42.8,99.565 42.925,99.44 Q34.1@46.413,99.44 46.467,99.494 50.129,99.494 R94.1@51.225,100.59
NetC28_2: C28.2 Q35.1 R91.1 R96.2 | length 6.8
  B.Cu w0.3: R91.1@40.675,127.69 40.675,127.615 42.575,125.715 R96.2@42.9,125.715 46.388,125.715 Q35.1@46.513,125.59
NetC29_2: C29.2 Q36.1 R92.1 R98.2 | length 9
  B.Cu w0.254: R98.2@42.8,107.565 46.163,107.565 Q36.1@46.413,107.315 49.075,107.315 50.2,108.44 R92.1@51.225,108.44
NetC30_2: C30.2 Q37.1 R100.1 R101.2 | length 5.4
  F.Cu w0.3: v3(46.75,84.74) 46.8,84.79 R100.1@46.8,85.265
  B.Cu w0.3: R101.2@42.53,85.315 46.748,85.315 Q37.1@46.873,85.19 46.75,85.067 v3(46.75,84.74)
NetC31_2: C31.2 Q38.1 R99.1 R102.2 | length 10.2
  B.Cu w0.254: R102.2@42.8,92.765 42.85,92.815 44.57,92.815 44.745,92.64 Q38.1@46.413,92.64 47.2,92.64 48.35,91.49 51.55,91.49 52.1,92.04 R99.1@52.175,92.04
NetC32_2: C32.2 Q39.1 R104.1 R105.2 | length 5.2
  F.Cu w0.3: R104.1@45,71.815 45.775,71.815 v3(45.8,71.79)
  B.Cu w0.3: R105.2@42.62,71.915 42.745,71.79 Q39.1@46.963,71.79
NetC37_2: C37.2 Q40.1 R103.1 R106.2 | length 7.4
  F.Cu w0.3: v3(45.8,77.64) 45.85,77.69 R103.1@45.85,78.415
  B.Cu w0.3: R106.2@42.27,78.615 46.488,78.615 Q40.1@46.613,78.49 ; C37.2@44.04,78.665 45.065,77.64 v3(45.8,77.64)
NetC38_2: C38.2 Q41.1 R108.1 R109.2 | length 5.6
  F.Cu w0.3: R108.1@43.95,58.415 45.125,58.415 v3(45.15,58.44)
  B.Cu w0.3: R109.2@42.32,58.415 46.538,58.415 Q41.1@46.663,58.29
NetC39_2: C39.2 Q42.1 R107.1 R110.2 | length 5.4
  F.Cu w0.3: R107.1@44.05,65.065 44.975,65.065 v3(45,65.04)
  B.Cu w0.3: R110.2@42.22,65.165 42.345,65.04 Q42.1@46.563,65.04
NetC40_2: C40.2 Q43.1 R112.1 R113.2 | length 6.3
  F.Cu w0.3: v3(43.35,45.34) 43.375,45.315 R112.1@45.6,45.315
  B.Cu w0.3: R113.2@42.45,45.315 43.65,45.315 ; v3(43.35,45.34) 43.625,45.34 43.65,45.315 ; Q43.1@46.163,45.19 46.038,45.315 43.65,45.315
NetC41_2: C41.2 Q44.1 R111.1 R114.2 | length 5.2
  F.Cu w0.3: v3(43.15,51.84) 43.175,51.865 R111.1@43.95,51.865
  B.Cu w0.3: R114.2@42.17,51.865 44.6,51.865 46.388,51.865 Q44.1@46.513,51.74
NetC42_2: C42.2 Q45.1 R116.1 R117.2 | length 6.2
  B.Cu w0.3: R116.1@40.625,31.54 46.663,31.54 Q45.1@46.763,31.44
NetC43_2: C43.2 Q46.1 R115.1 R118.2 | length 8.5
  B.Cu w0.3: R115.1@38.275,38.49 38.825,37.94 41.9,37.94 42.45,38.49 42.45,38.565 42.575,38.44 Q46.1@46.163,38.44
NetC44_2: C44.2 Q47.1 R120.1 R121.2 | length 6.2
  B.Cu w0.3: R121.2@42.45,16.515 42.513,16.453 46.48,16.453 Q47.1@46.543,16.39 ; C44.2@44.22,16.565 44.245,16.565 44.675,16.135 R120.1@44.675,14.69
NetC45_2: C45.2 Q48.1 R119.1 R122.2 | length 8.6
  B.Cu w0.254: R119.1@38.475,24.69 38.825,24.34 41.6,24.34 42.275,23.665 R122.2@42.633,23.665
  B.Cu w0.3: R122.2@42.633,23.665 42.758,23.54 Q48.1@46.613,23.54
NetJ9_1: J9.1 R90.1 | length 3
  B.Cu w0.254: R90.1@38.8,8.565 40.665,8.565 J9.1@41.49,9.39
NetJ9_2: J9.2 R89.1 | length 9.4
  B.Cu w0.254: R89.1@36.45,8.565 36.45,8.04 36.9,7.59 42.9,7.59 44.03,8.72 J9.2@44.03,9.39
NetJ9_3: J9.3 R87.1 | length 9.8
  B.Cu w0.254: J9.3@46.57,9.39 46.57,8.17 47.2,7.54 53.425,7.54 R87.1@54.45,8.565
NetJ9_4: J9.4 R88.1 | length 3.5
  B.Cu w0.254: J9.4@49.11,9.39 49.935,8.565 R88.1@52.25,8.565
NetK1_A1: K1.A1 Q4.3 | length 2.8
  B.Cu w0.6: K1.A1@40.16,123.745 40.303,123.602 41.933,123.602 Q4.3@42.583,122.952
NetK1_A2: K1.A2 Q3.3 | length 4
  B.Cu w0.6: K1.A2@40.16,116.245 42.563,118.647 Q3.3@42.563,119.252
NetK4_A1: K4.A1 Q18.3 | length 3
  B.Cu w0.6: K4.A1@40.16,110.307 41.655,111.802 Q18.3@42.563,111.802
NetK4_A2: K4.A2 Q19.3 | length 3
  B.Cu w0.6: K4.A2@40.16,102.807 41.605,104.252 Q19.3@42.563,104.252
NetK5_A1: K5.A1 Q20.3 | length 2.4
  B.Cu w0.6: K5.A1@40.16,96.906 40.207,96.952 Q20.3@42.563,96.952
NetK5_A2: K5.A2 Q21.3 | length 2.6
  B.Cu w0.6: K5.A2@40.16,89.406 40.669,89.915 Q21.3@42.563,89.915
NetK6_A1: K6.A1 Q22.3 | length 2.7
  B.Cu w0.6: K6.A1@40.16,83.504 40.924,82.74 Q22.3@42.563,82.74
NetK6_A2: K6.A2 Q23.3 | length 2.4
  B.Cu w0.6: K6.A2@40.16,76.004 42.511,76.004 Q23.3@42.563,75.952
NetK7_A1: K7.A1 Q24.3 | length 2.7
  B.Cu w0.6: K7.A1@40.16,70.103 40.923,69.34 Q24.3@42.563,69.34
NetK7_A2: K7.A2 Q25.3 | length 2.4
  B.Cu w0.6: K7.A2@40.16,62.603 42.5,62.603 Q25.3@42.563,62.54
NetK8_A1: K8.A1 Q26.3 | length 2.7
  B.Cu w0.6: K8.A1@40.16,56.701 40.946,55.915 Q26.3@42.563,55.915
NetK8_A2: K8.A2 Q27.3 | length 2.5
  B.Cu w0.6: K8.A2@40.16,49.201 40.299,49.34 Q27.3@42.563,49.34
NetK9_A1: K9.A1 Q28.3 | length 2.6
  B.Cu w0.6: K9.A1@40.16,43.3 40.67,42.79 Q28.3@42.563,42.79
NetK9_A2: K9.A2 Q29.3 | length 2.4
  B.Cu w0.6: K9.A2@40.16,35.8 40.263,35.902 Q29.3@42.563,35.902
NetK10_A1: K10.A1 Q30.3
NetK10_A2: K10.A2 Q31.3 | length 2.7
  B.Cu w0.3: K10.A2@40.16,22.25 40.415,22.25 41.825,20.84 Q31.3@42.263,20.84
NetK11_A1: K11.A1 Q33.3 | length 2.4
  B.Cu w0.6: Q33.3@48.288,115.44 49.569,115.44 K11.A1@50.369,116.24
NetK11_A2: K11.A2 Q35.3 | length 4.2
  B.Cu w0.6: Q35.3@48.388,126.54 49.4,126.54 50.369,125.571 K11.A2@50.369,123.74
NetK12_A1: K12.A1 Q34.3 | length 3.3
  B.Cu w0.6: Q34.3@48.288,100.39 50.41,102.513 K12.A1@50.41,102.797